# EAGLE board ScreenTeensy rev1 (EAGLE 8.4.1)
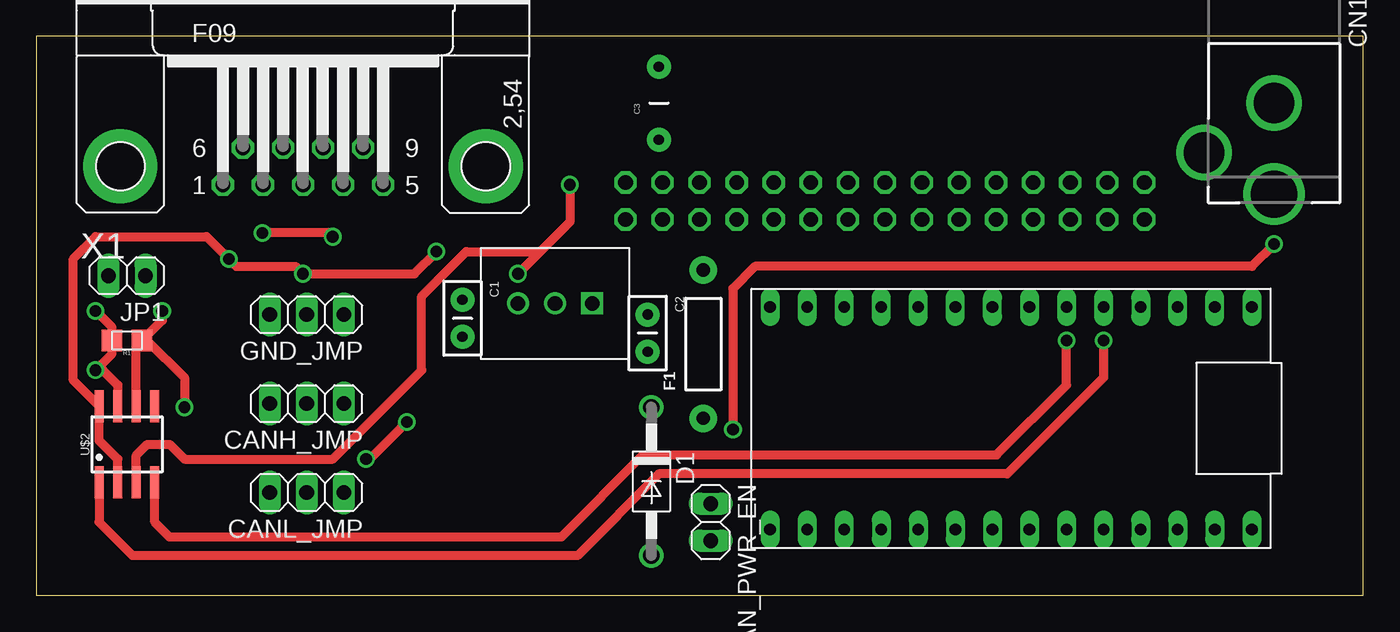
[diagram p0: board, top side]
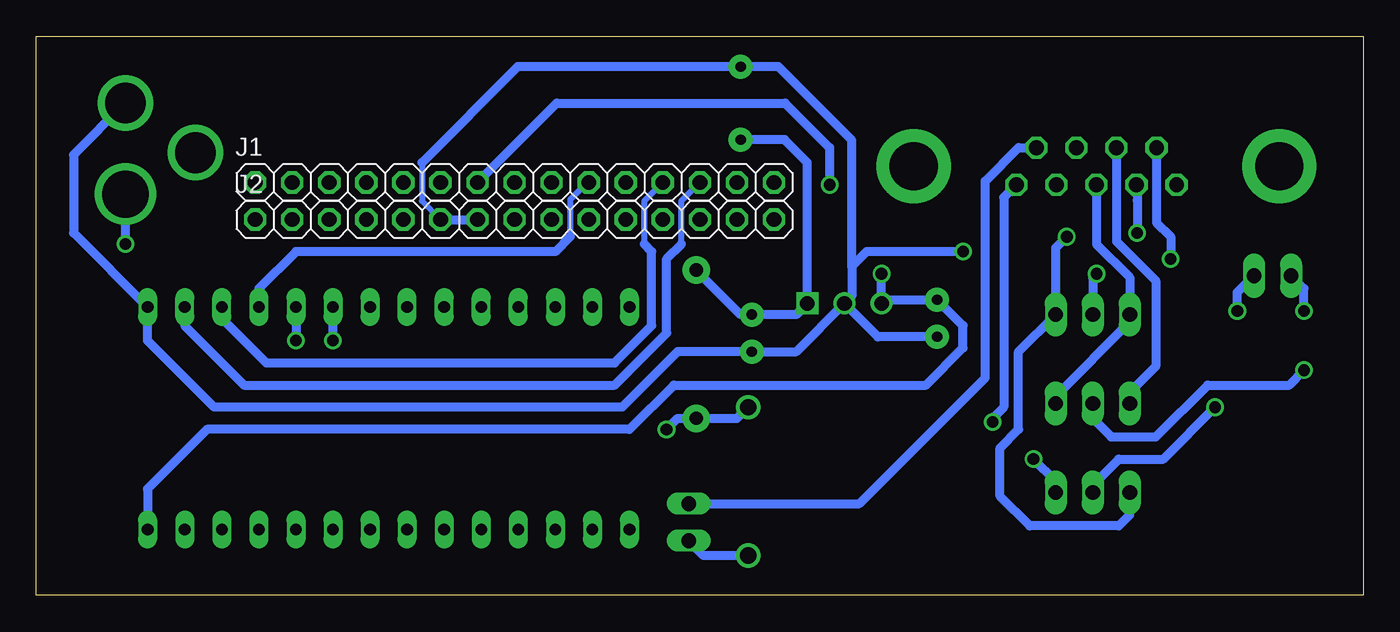
[diagram p1: board, bottom side, seen from below]

Size 90.91 x 38.28 mm. Coordinates in mm from the lower left corner, seen from the top.
Outline: 90.91,38.28 0,38.28 0,0 90.91,0 90.91,38.28
Copper layers (1*16): Top 0.035mm / dielectric 1.5mm / Bottom 0.035mm
Design rules "DRC Electronics Lab": minimum track width 16mil, minimum drill 19mil, track to track 16mil, track to pad 12mil, pad to pad 16mil, via to via 16mil, smd to smd 10mil, copper to edge 40mil, drill to drill 10mil, minimum pad ring 10mil, minimum via ring 8mil, stop-mask expansion 4mil, vias tented up to drill 0mil, thermal gap 10mil

## Footprints (pad centres in the part's own frame; a part is rotated, then mirrored left to right if it is on the bottom)
CAP-PTH-SMALLEZ = drill 0.7 pad 1.651: 1 0,0; 2 2.54,0
CAP-PTH-5MM = drill 0.7 pad 1.651: 1 -2.5,0; 2 2.5,0
1X02 = drill 1.016 long: 1 -1.27,0; 2 1.27,0
1X03 = drill 1.016 long: 1 -2.54,0; 2 0,0; 3 2.54,0
DCJACK_2MM_PTH = drill 2.8: GND 0,7.35; GNDBREAK 4.8,10.75 | drill 3.2: PWR 0,13.6
DO-41 = drill 1.118: A 5.08,0; C -5.08,0
AXIAL-0.4 = drill 0.9 pad 1.88: P$1 -5.08,0; P$2 5.08,0
TO-220-SPACED = drill 1 square: 1 -2.54,0 | drill 1: 2 0,0; 3 2.54,0
1X15 = drill 1.016 octagon: 1 0,0; 2 2.54,0; 3 5.08,0; 4 7.62,0; 5 10.16,0; 6 12.7,0; 7 15.24,0; 8 17.78,0; 9 20.32,0; 10 22.86,0; 11 25.4,0; 12 27.94,0; 13 30.48,0; 14 33.02,0; 15 35.56,0
0805 = smd 1.4 x 1.5: 1 -1.025,0; 2 1.025,0
TEENSY_3.2_SIMPLE = drill 0.8 long: 3.3V 16.51,29.21; A0 16.51,3.81; A1 16.51,6.35; A2 16.51,8.89; A3 16.51,11.43; A4 16.51,13.97; A5 16.51,16.51; A6 16.51,19.05; A7 16.51,21.59; A8 16.51,24.13; A9 16.51,26.67; AGND 16.51,31.75; D0(RX1) 1.27,31.75; D1(TX1) 1.27,29.21; D2 1.27,26.67; D3(CANTX) 1.27,24.13; D4(CANRX) 1.27,21.59; D5 1.27,19.05; D6 1.27,16.51; D7(RX3) 1.27,13.97; D8(TX3) 1.27,11.43; D9(RX2) 1.27,8.89; D10(TX2) 1.27,6.35; D11 1.27,3.81; D12 1.27,1.27; D13 16.51,1.27; GND 1.27,34.29; VIN 16.51,34.29
SOIC-08 = smd 0.6 x 2.2: 1 -1.905,-2.6; 2 -0.635,-2.6; 3 0.635,-2.6; 4 1.905,-2.6; 5 1.905,2.6; 6 0.635,2.6; 7 -0.635,2.6; 8 -1.905,2.6
F09HP = drill 1.016 octagon: 1 -5.486,-1.27; 2 -2.743,-1.27; 3 0,-1.27; 4 2.743,-1.27; 5 5.486,-1.27; 6 -4.115,1.27; 7 -1.372,1.27; 8 1.372,1.27; 9 4.115,1.27 | drill 3.302 pad 5.08: G1 -12.522,0; G2 12.522,0

## Placement (x,y rotation side)
C1  .1µF  [CAP-PTH-SMALLEZ]  29.19,20.24 270 top
C2  .33µF  [CAP-PTH-SMALLEZ]  41.89,19.23 270 top
C3  [CAP-PTH-5MM]  42.65,33.71 90 top
CAN_PWR_EN  [1X02]  46.21,5 270 top
CANH_JMP  [1X03]  18.52,13.13 180 top
CANL_JMP  [1X03]  18.52,7.04 180 top
CN1  [DCJACK_2MM_PTH]  84.82,41.07 180 top
D1  DIODEDO-41  [DO-41]  42.14,7.8 270 top
F1  [AXIAL-0.4]  45.7,17.2 90 top
GND_JMP  [1X03]  18.52,19.23 180 top
IC1  [TO-220-SPACED]  35.54,19.99 180 top
J1  [1X15]  75.93,28.28 0 bottom
J2  [1X15]  75.93,25.74 0 bottom
JP1  M02  [1X02]  6.2,21.89 180 top
R1  120  [0805]  6.2,17.45 180 top
U$1  TEENSY_3.2_SIMPLE  [TEENSY_3.2_SIMPLE]  49,21.01 270 top
U$2  MCP2551  [SOIC-08]  6.2,10.34 0 top
X1  [F09HP]  18.27,29.39 0 top

## Library data of the parts
C1-C3 CAN_PWR_EN CANH_JMP CANL_JMP CN1 D1 F1 GND_JMP IC1 J1 J2 JP1 R1 U$1 U$2 = HyTechDevices
X1 = con-subd; OC_FARNELL: unknown; OC_NEWARK: unknown

## Nets
+5V: C1.1 IC1.3 J1.7 U$1.VIN U$2.3
+12V: C2.1 C3.1 F1.P$2 IC1.1
CANH: CANH_JMP.2 JP1.2 R1.2 U$2.7
CANL: CANL_JMP.2 JP1.1 R1.1 U$2.6
CANRX: U$1.D4(CANRX) U$2.4
CANTX: U$1.D3(CANTX) U$2.1
GND: C1.2 C2.2 C3.2 CN1.GND GND_JMP.2 IC1.2 J2.6 J2.7 U$1.GND U$2.2 U$2.8 X1.6
GNDBREAK: CN1.GNDBREAK
N$1: CAN_PWR_EN.2 D1.A
N$6: CAN_PWR_EN.1 X1.9
P2: CANL_JMP.3 GND_JMP.1 X1.2
P3: CANH_JMP.1 GND_JMP.3 X1.3
P5: CANL_JMP.1 X1.5
P7: CANH_JMP.3 X1.7
SCREEN_RS: J1.10 U$1.D2
SCREEN_RX: J1.12 U$1.D1(TX1)
SCREEN_TX: J1.13 U$1.D0(RX1)
V+: CN1.PWR D1.C F1.P$1

## Tracks (layer width: path | path; a pad name or v marks a point on that pad's centre or on a via)
+5V  (via drill 0.8)
  Top 0.61: v36.56,28.12 36.56,25.58 34.52,23.55 | 34.52,23.55 v33,22.02 | U$2.3 6.84,9.58 7.6,10.34 9.12,10.34 10.14,9.32 20.3,9.32 26.4,15.42 26.4,20.5 29.44,23.55 34.52,23.55
  Bottom 0.61: IC1.3 32.75,20.24 C1.1 27.41,18.47 27.41,16.94 29.95,14.4 47.22,14.4 50.27,11.35 79.23,11.35 83.29,7.29 U$1.VIN | IC1.3 33,20.24 | J1.7 55.26,33.71 39.6,33.71 36.56,30.66 v36.56,28.12 | IC1.3 v33,22.02
+12V
  Bottom 0.61: C3.1 39.64,31.21 38.08,29.64 IC1.1 38.84,19.23 C2.1 42.65,19.23 F1.P$2
CANH  (via drill 0.8)
  Top 0.61: U$2.7 5.57,14.4 4.55,15.42 v4.04,15.42 5.18,16.55 R1.2 5.18,18.35 v4.04,19.48
  Bottom 0.61: CANH_JMP.2 18.52,12.12 17.25,10.85 14.2,10.85 10.65,14.4 5.06,14.4 v4.04,15.42 | v4.04,19.48 4.04,21.01 JP1.2
CANL  (via drill 0.8)
  Top 0.61: v10.14,12.88 10.14,14.91 7.6,17.45 R1.1 | U$2.6 6.84,17.06 R1.1 | v8.62,19.48 8.62,18.84 R1.1
  Bottom 0.61: CANL_JMP.2 18.52,7.54 16.74,9.32 13.7,9.32 v10.14,12.88 | v8.62,19.48 8.62,20.75 JP1.1
CANRX  (via drill 0.8)
  Top 0.61: U$2.4 8.11,5 9.12,3.99 35.95,3.99 41.58,9.61 65.8,9.61 70.59,14.4 v70.59,17.45
  Bottom 0.61: v70.59,17.45 U$1.D4(CANRX)
CANTX  (via drill 0.8)
  Top 0.61: v73.13,17.45 73.13,14.91 66.53,8.31 42.65,8.31 37.06,2.72 6.58,2.72 4.3,5 U$2.1
  Bottom 0.61: U$1.D3(CANTX) v73.13,17.45
GND  (via drill 0.8)
  Top 0.61: U$2.2 5.57,9.32 4.3,10.59 U$2.8 2.52,14.72 2.52,23.04 4.04,24.56 11.66,24.56 v13.19,23.04 13.7,22.53 17.76,22.53 v18.27,22.02 25.89,22.02 v27.41,23.55
  Bottom 0.406: 64.5,29.64 64.5,27.01 J2.6
  Bottom 0.61: C1.2 33.25,17.7 IC1.2 | X1.6 14.15,25.53 13.19,24.56 v13.19,23.04 | v18.27,22.02 18.52,21.77 GND_JMP.2 | J2.6 J2.7 | CN1.GND 88.37,30.17 88.37,24.82 U$1.GND 83.29,17.45 78.72,12.88 50.78,12.88 46.97,16.69 C2.2 38.84,16.69 IC1.2 | 64.5,29.64 57.93,36.21 C3.2 40.07,36.21 35.03,31.17 35.03,22.53 | IC1.2 35.03,20.5 35.03,22.53 | 35.03,22.53 34.02,23.55 v27.41,23.55
N$1
  Bottom 0.61: D1.A 45.19,2.72 CAN_PWR_EN.2
N$6
  Bottom 0.61: X1.9 23.6,30.66 25.89,28.37 25.89,14.91 34.52,6.27 CAN_PWR_EN.1
P2  (via drill 0.8)
  Top 0.61: v20.3,24.56 20.05,24.82 v15.47,24.82
  Bottom 0.61: CANL_JMP.3 15.98,5.51 16.74,4.75 22.84,4.75 24.87,6.78 24.87,10.08 23.6,11.35 23.6,16.69 GND_JMP.1 21.06,23.8 v20.3,24.56 | X1.2 15.47,27.05 v15.47,24.82
P3
  Bottom 0.61: CANH_JMP.1 21.06,13.64 15.98,18.72 GND_JMP.3 15.98,21.77 18.27,24.05 X1.3
P5  (via drill 0.8)
  Top 0.61: v25.38,11.86 22.84,9.32 v22.59,9.32
  Bottom 0.61: X1.5 24.62,27.25 24.62,12.88 25.38,12.12 v25.38,11.86 | v22.59,9.32 21.06,7.8 CANL_JMP.1
P7
  Bottom 0.61: CANH_JMP.3 15.98,13.89 14.2,15.67 14.2,21.54 16.9,24.24 X1.7
SCREEN_RS
  Bottom 0.406: J1.10 53.16,28.28 54.34,27.1 54.34,24.56
  Bottom 0.61: 54.34,24.56 55.35,23.55 73.13,23.55 75.67,21.01 U$1.D2
SCREEN_RX
  Bottom 0.406: 49.26,24.05 49.26,27.01 J1.12
  Bottom 0.61: U$1.D1(TX1) 78.21,18.97 75.16,15.93 51.29,15.93 48.75,18.47 48.75,23.55 49.26,24.05
SCREEN_TX
  Bottom 0.406: 46.72,24.05 46.72,27.01 J1.13
  Bottom 0.61: U$1.D0(RX1) 80.75,18.47 76.69,14.4 51.29,14.4 47.73,17.96 47.73,23.04 46.72,24.05
V+  (via drill 0.8)
  Top 0.61: v84.82,24.05 83.29,22.53 49.26,22.53 47.73,21.01 v47.73,11.35
  Bottom 0.61: CN1.PWR v84.82,24.05 | D1.C 42.91,12.12 F1.P$1 46.97,12.12 v47.73,11.35

## Text on the board
tDocu: Face towards screen | Secondary Screen Controller, rev1 | Designed by Nathan Cheek (2018)